# Altium PCB PCI Express_16765X11115_36PIN_Half length.PCBDOC (part 1 of 2)
Units mil, origin at the board's own origin, x right, y up, seen from the top; angles counter-clockwise.
Board outline 6725.36 x 2712.6 mil, 4 copper layers (TopLayer, InternalPlane1, InternalPlane2, BottomLayer); 107 components, 103 nets, 466 pads, 237 vias.
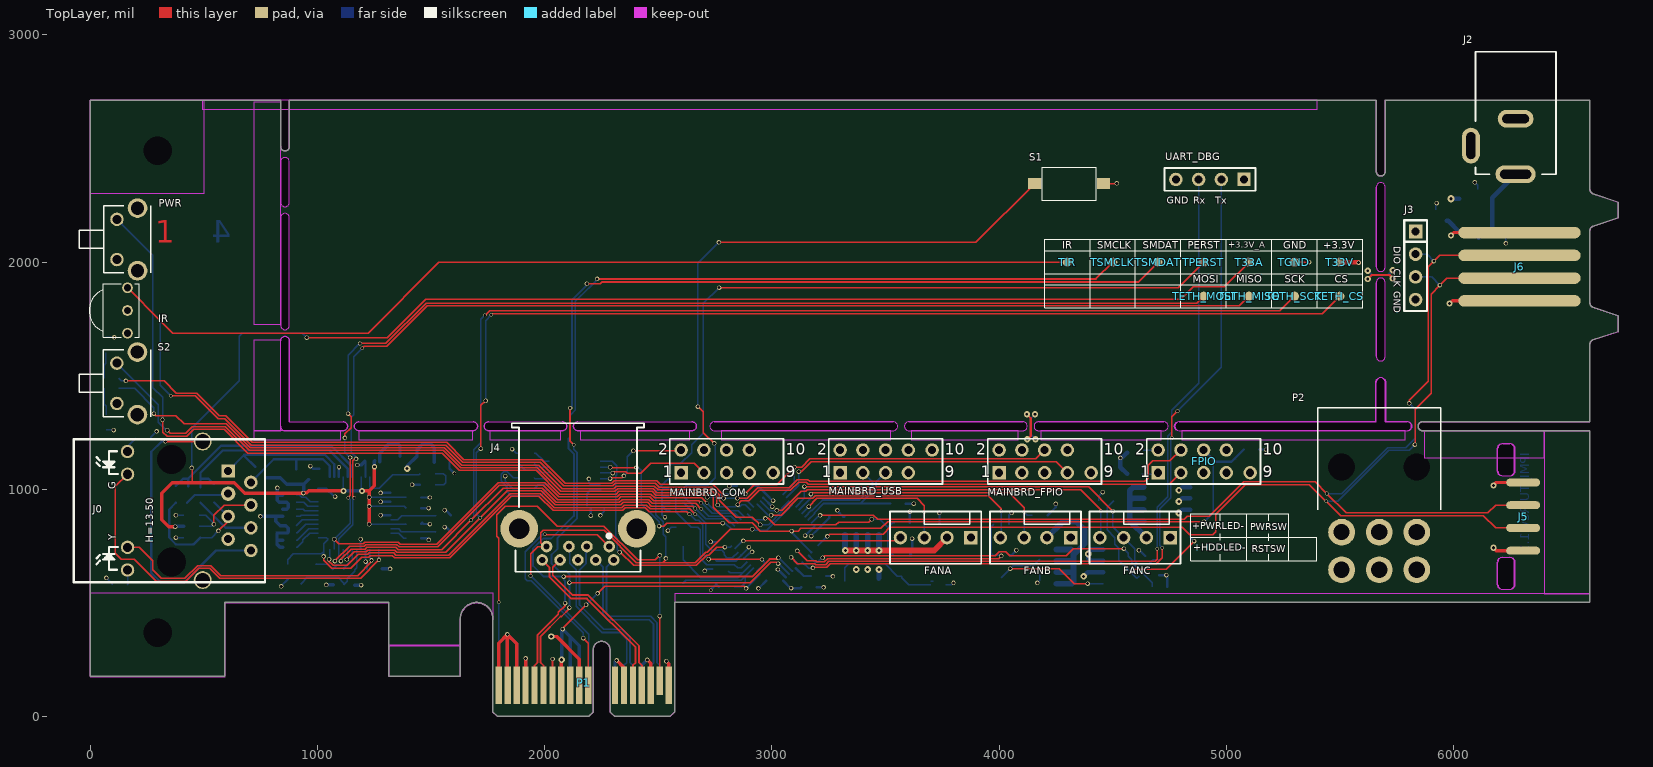
[diagram p0: TopLayer view]
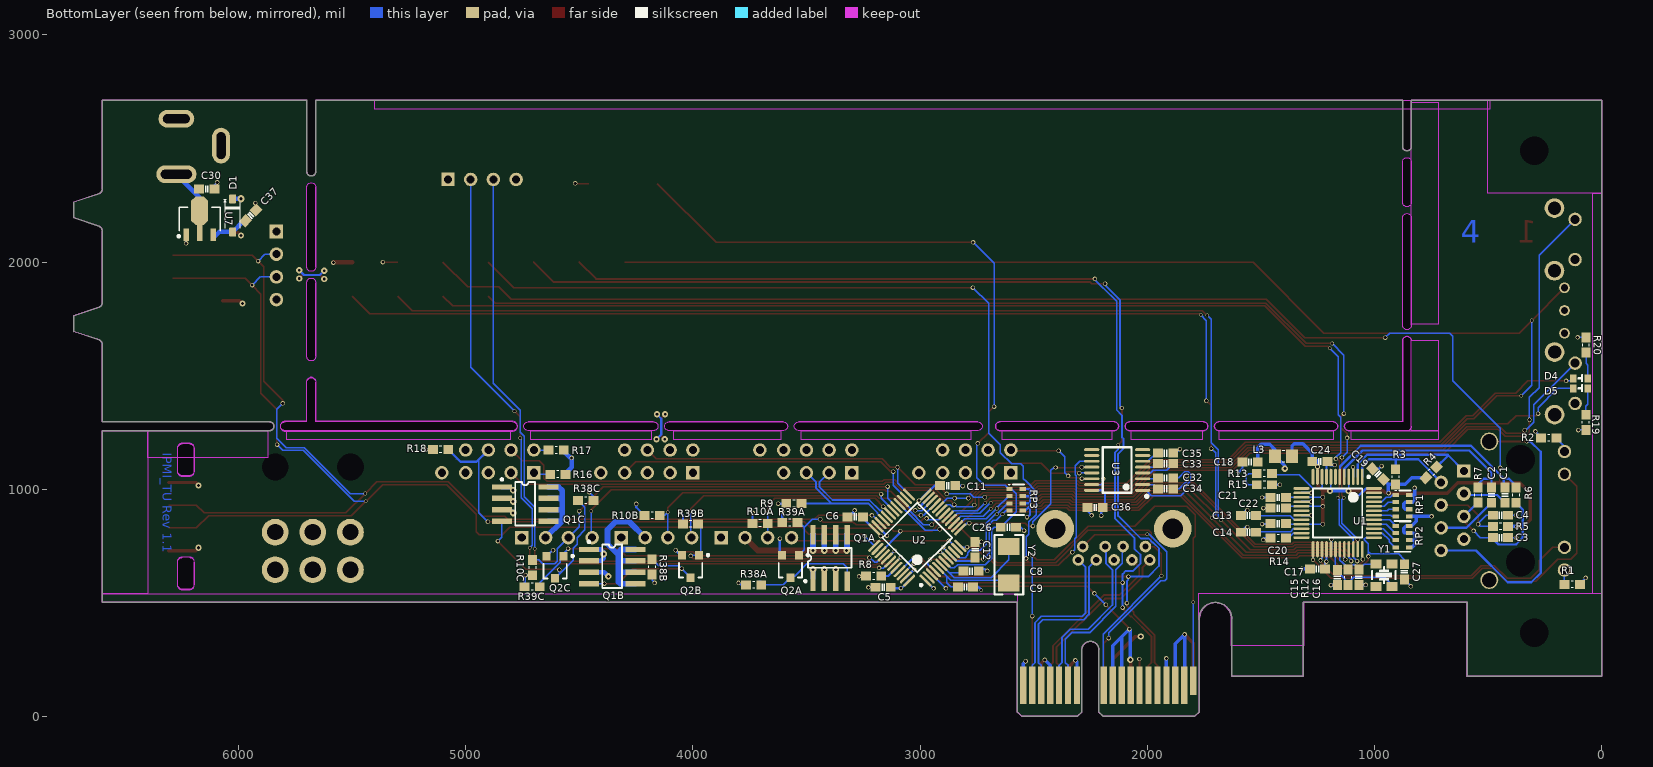
[diagram p1: BottomLayer view, seen from below]
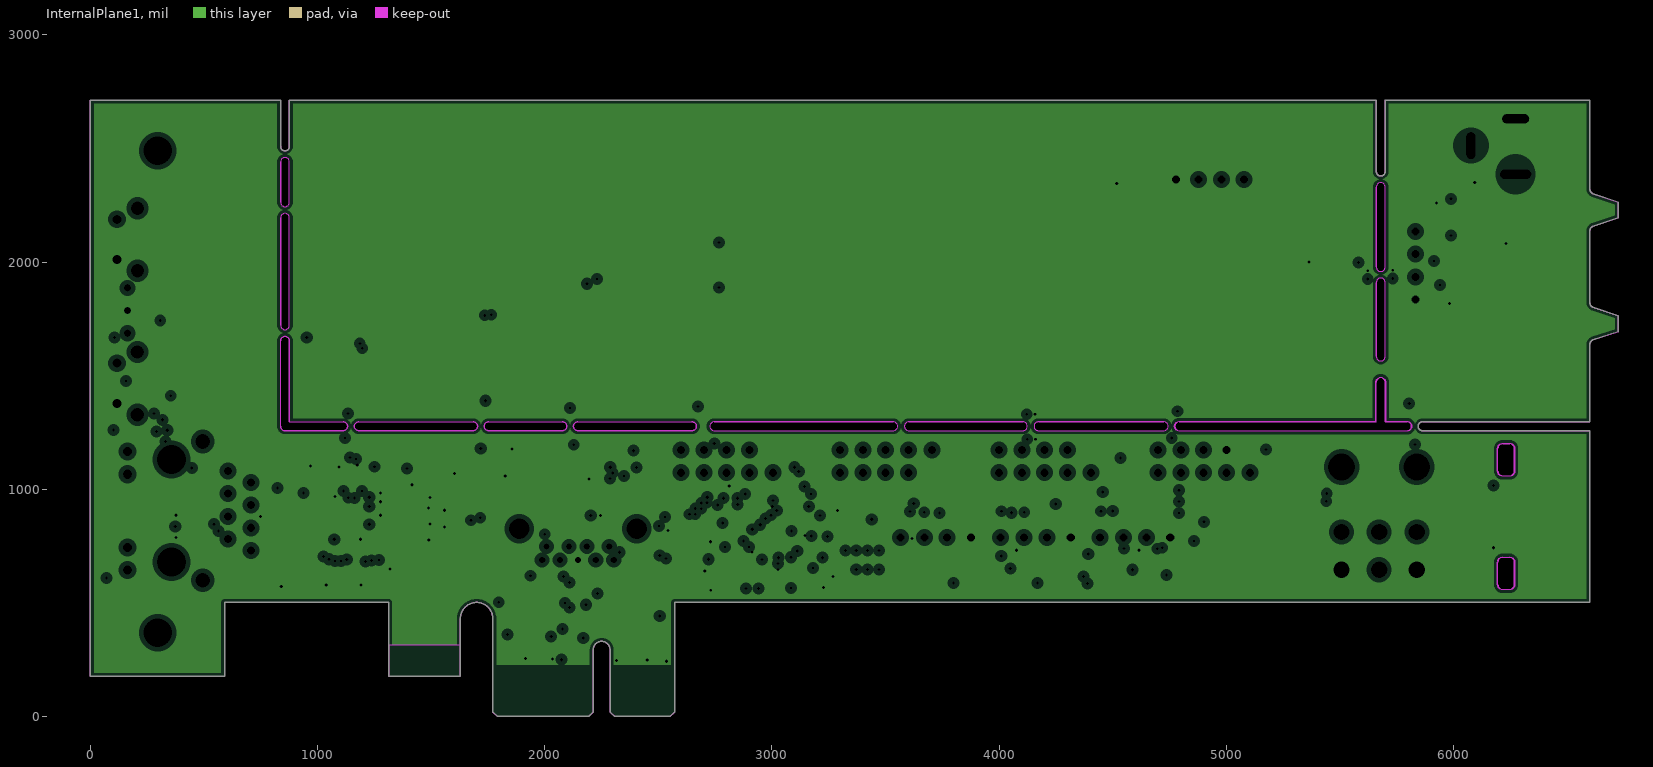
[diagram p2: InternalPlane1, clearances drawn from the general rule]
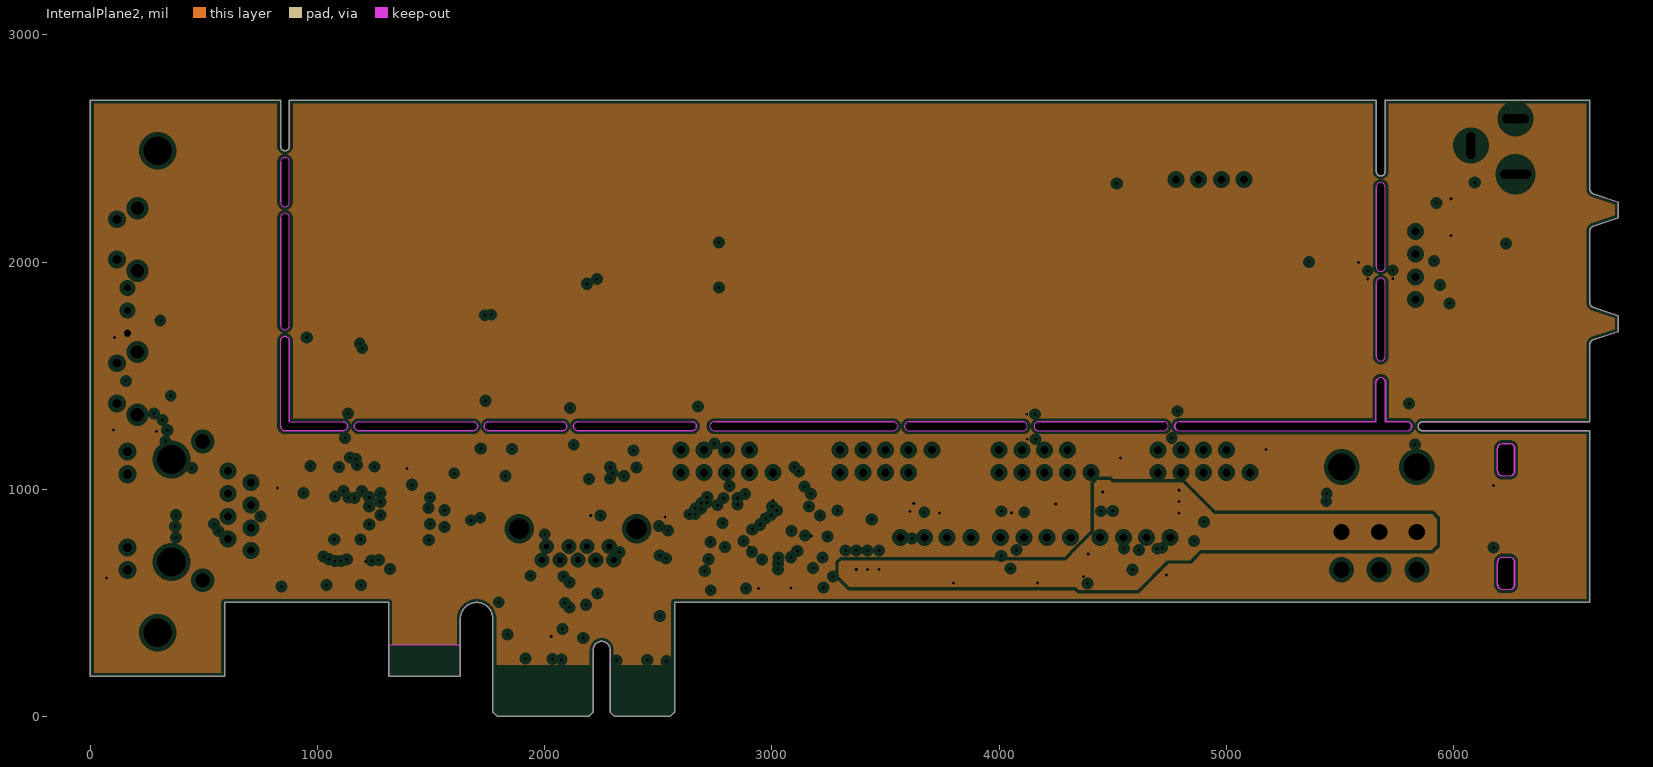
[diagram p3: InternalPlane2, clearances drawn from the general rule]
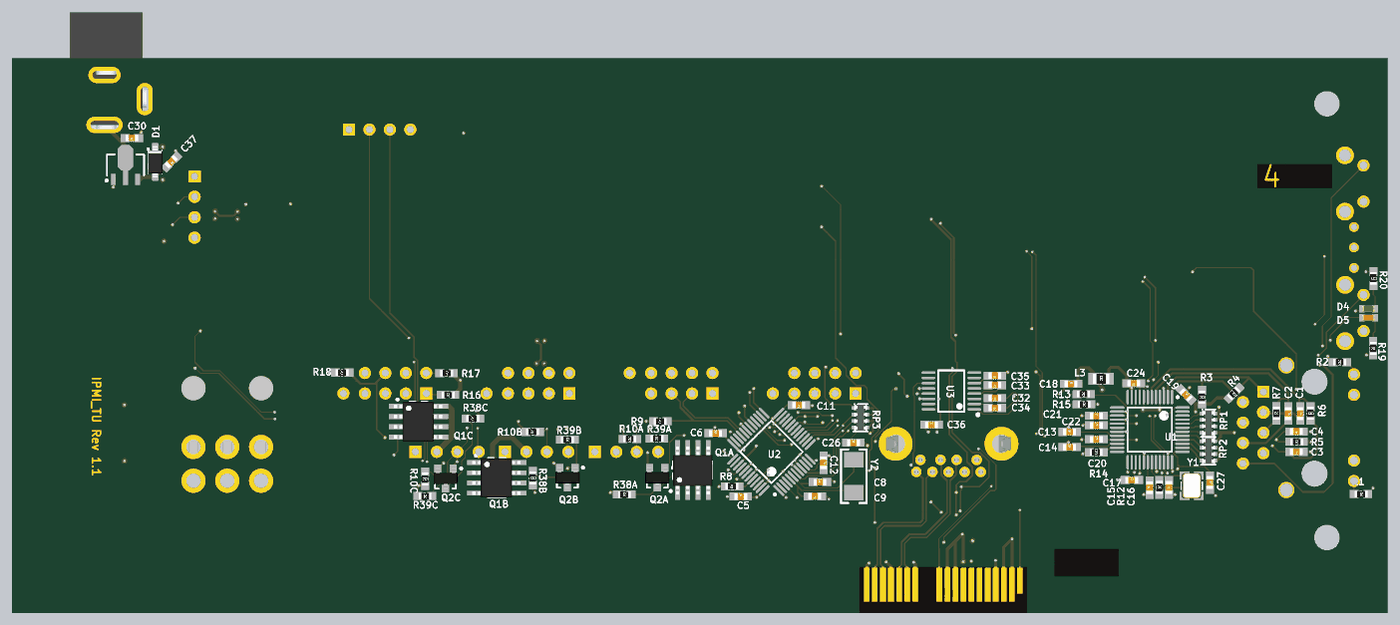
[diagram p5: 3D render of the assembled board from below, using the file's embedded part models]

## Layer stack, top to bottom
TopSolder: solder mask 0.4, Solder Resist, Dk 3.5
TopLayer: signal copper 0.7
Dielectric1: core 12.5984, FR-4, Dk 4.8
InternalPlane1: plane copper 1.4, net GND
Dielectric2: prepreg 12.6, FR-4, Dk 4.8
InternalPlane2: plane copper 1.4, net (Multiple Nets)
Dielectric3: core 12.6, FR-4, Dk 4.8
BottomLayer: signal copper 0.7
BottomSolder: solder mask 0.4, Solder Resist, Dk 3.5

## Board outline
1312.99,177.17 1627.95,177.17 1627.95,430.12 cw(c1699.8,430.12) 1771.65,430.12 1771.65,19.68 1791.34,0 2192.91,0 2212.6,19.68 2212.6,293.31 cw(c2250,293.31) 2287.4,293.31 2287.4,19.68 2307.09,0 2551.18,0 2570.87,19.68 2570.87,501.97 6600.39,501.97 6600.39,1257.87 5864,1257.87 cw(c5864,1277.56) 5864,1297.24 6600.39,1297.24 6600.39,1638.84 cw(c6620.08,1638.84) 6613.85,1657.51 6725.36,1694.68 6725.36,1764.68 6613.85,1801.85 cw(c6620.08,1820.53) 6600.39,1820.53 6600.39,2138.84 cw(c6620.08,2138.84) 6613.85,2157.51 6725.36,2194.68 6725.36,2264.68 6613.85,2301.85 cw(c6620.08,2320.53) 6600.39,2320.53 6600.39,2712.6 5699.37,2712.6 5699.37,2398.9 cw(c5679.68,2398.9) 5660,2398.9 5660,2712.6 875.98,2712.6 875.98,2509.84 cw(c856.3,2509.84) 836.61,2509.84 836.61,2712.6 0,2712.6 0,177.17 590.55,177.17 590.55,501.97 1312.99,501.97
cut-out: 5660,1585 ccw(c5679.68,1585) 5699.37,1585 5699.37,1910 ccw(c5679.68,1910) 5660,1910
cut-out: 5660,1978.9 ccw(c5679.68,1978.9) 5699.37,1978.9 5699.37,2330 ccw(c5679.68,2330) 5660,2330
cut-out: 4793.31,1255.89 cw(c4793.31,1277.56) 4793.31,1299.23 5658.02,1299.23 5658.02,1471 cw(c5679.68,1471) 5701.35,1471.02 cw(c5699.37,1471) 5701.35,1471 5701.35,1299.23 5795.1,1299.23 cw(c5795.1,1277.56) 5816.77,1277.56 cw(c5795.1,1277.56) 5795.1,1255.89
cut-out: 4173.23,1257.87 4724.41,1257.87 ccw(c4724.41,1277.56) 4724.41,1297.24 4173.23,1297.24 ccw(c4173.23,1277.56)
cut-out: 2145.67,1257.87 cw(c2145.67,1277.56) 2145.67,1297.24 2647.64,1297.24 cw(c2647.64,1277.56) 2647.64,1257.87
cut-out: 2746.06,1257.87 3533.46,1257.87 ccw(c3533.46,1277.56) 3533.46,1297.24 2746.06,1297.24 ccw(c2746.06,1277.56)
cut-out: 3602.36,1257.87 4104.33,1257.87 ccw(c4104.33,1277.56) 4104.33,1297.24 3602.36,1297.24 ccw(c3602.36,1277.56)
cut-out: 836.61,2263.78 ccw(c856.3,2263.78) 875.98,2263.78 875.98,2440.94 ccw(c856.3,2440.94) 836.61,2440.94
cut-out: 836.61,1722.44 ccw(c856.3,1722.44) 875.98,1722.44 875.98,2194.88 ccw(c856.3,2194.88) 836.61,2194.88
cut-out: 856.3,1257.87 cw(c856.3,1277.56) 836.61,1277.56 836.61,1653.54 cw(c856.3,1653.54) 875.98,1653.54 875.98,1297.24 1112.2,1297.24 cw(c1112.2,1277.56) 1112.2,1257.87
cut-out: 1181.1,1257.87 cw(c1181.1,1277.56) 1181.1,1297.24 1684.1,1297.24 cw(c1684.1,1277.56) 1684.1,1257.87
cut-out: 1753,1257.87 cw(c1753,1277.56) 1753,1297.24 2076.77,1297.24 cw(c2076.77,1277.56) 2076.77,1257.87

## Design rules (kind name [scope] priority, off if disabled: settings)
Clearance Clearance_1 [OnLayer('KeepOutLayer')] p1: gap=4 ignorepadtopadclearanceinfootprint=FALSE
Clearance [All] p2: gap=6 ignorepadtopadclearanceinfootprint=FALSE except(0: Arc-Hole Track-Hole SMDPad-Hole THPad-Hole Via-Hole Fill-Hole Poly-Hole Region-Hole Text-Hole)
ComponentClearance [All] p1: gap=10 collisioncheckmode=3 verticalgap=6 showdistances=FALSE
DiffPairsRouting [All] p1: maxlimit=10 minlimit=10 mostfreqgap=6.85 toplayer_minwidth=6 toplayer_maxwidth=15 toplayer_prefwidth=9.25 bottomlayer_minwidth=6 bottomlayer_maxwidth=15 bottomlayer_prefwidth=9.25 maxuncoupledlength=500
FabricationTestPointUsage TestPointUsage [All] p1: valid=0 allowmultiple=FALSE
FabricationTestpoint Testpoint [All] p1: side=3 testpointundercomponent=TRUE minsize=40 maxsize=100 preferedsize=60 minholesize=20 maxholesize=40 preferedholesize=32 testpointgrid=1 allowsidetop=TRUE allowsidebottom=TRUE usegrid=TRUE gridtolerance=0.01
Height "PCI Express, Page 84, \"Component Height Constraints\" for solder side" [OnBottomLayer] p1: minheight=0 maxheight=105.12 prefheight=105.12
Height "PCI Express, Page 84, \"Component Height Constraints\" for component side" [OnTopLayer] p2: minheight=0 maxheight=569.68 prefheight=569.68
HoleSize [All] p1: absolutevalues=TRUE maxlimit=354.33 minlimit=0.98 maxpercent=80.000 minpercent=20.000
HoleToHoleClearance [All] p1: gap=6 allowstackedmicrovias=TRUE
MinimumSolderMaskSliver [All] p1: minsoldermaskwidth=6
PlaneClearance [All] p1: clearance=19.68
PlaneConnect [All] p1: pad.planeconnectstyle=Relief pad.reliefexpansion=20 pad.reliefentries=4 pad.reliefconductorwidth=10 pad.reliefairgap=10 via.planeconnectstyle=Direct via.reliefexpansion=20 via.reliefentries=4 via.reliefconductorwidth=10 via.reliefairgap=10
PolygonConnect [All] p1: connectstyle=Relief reliefconductorwidth=10 reliefentries=4 polygonreliefangle="90 Angle" airgapwidth=10
RoomDefinition "Component Free Area" [InAnyComponent] p1: confinementstyle=ConfineOut formatcopy=TRUE lockcomponents=FALSE outline 5592.52,541.34 5592.52,555.12 5913.39,555.12 5913.39,633.86 6120.08,633.86 6120.08,541.34
RoomDefinition Fan3 [InComponentClass('Fan3')] p2: confinementstyle=ConfineIn formatcopy=TRUE lockcomponents=FALSE outline 4382.99,540.99 4893.99,540.99 4893.99,1073.99 4382.99,1073.99
RoomDefinition Fan2 [InComponentClass('Fan2')] p3: confinementstyle=ConfineIn formatcopy=FALSE lockcomponents=FALSE outline 3912.99,520.99 4510.99,520.99 4510.99,916.99 3912.99,916.99
RoomDefinition Fan1 [InComponentClass('Fan1')] p4: confinementstyle=ConfineIn formatcopy=FALSE lockcomponents=FALSE outline 3256.99,541.99 3935.99,541.99 3935.99,916.99 3256.99,916.99
RoutingVias [All] p1: holewidth=13.78 width=19.68 viastyle="Through Hole" minholewidth=13.78 minwidth=19.68 maxholewidth=28 maxwidth=50
SilkToSolderMaskClearance SilkscreenOverComponentPads [IsPad] p1: minsilkscreentomaskgap=10 clearancetoexposedcopper=TRUE
SolderMaskExpansion [All] p1: expansion=0
Width [All] p1: maxlimit=100 minlimit=6 preferedwidth=6
19 further rules are at their usual default settings.

## Classes and differential pairs
channel class FanConn: Fan1 Fan2 Fan3
component class "PCI Express_16765X6890_36PIN_Half length": C18 C26 C27 C30 C32 C33 C34 C35 C36 C37 D1 D4 D5 FPIO IR J2 J4 L3 MAINBRD_COM MAINBRD_FPIO MAINBRD_USB P2 PWR R16 R17 R18 R19 R20 RP3 S1 S2 T33A T33V TETH_CS TETH_MISO TETH_MOSI TETH_SCK TGND TIR TPERST TSMCLK TSMDAT U3 U7 UART_DBG
component class MCU: C5 C6 C8 C9 C11 C12 J3 J5 J6 R8 R9 U2 Y2
component class Fan3: FANC Q1C Q2C R10C R38C R39C
component class Fan2: FANB Q1B Q2B R10B R38B R39B
component class Fan1: FANA Q1A Q2A R10A R38A R39A
component class Ether: C1 C2 C3 C4 C13 C14 C15 C16 C17 C19 C20 C21 C22 C24 J0 R1 R2 R3 R4 R5 R6 R7 R12 R13 R14 R15 RP1 RP2 U1 Y1
component class PCI-E: P1
net class JTAG[1..5]: JTAG1 JTAG2 JTAG3 JTAG4 JTAG5
differential pair RXIN: +RXIN_P -RXIN_N
differential pair REFCLK: +REFCLK_P -REFCLK_N
differential pair USB0: +USB0_P -USB0_N
differential pair TX: +TX_P -TX_N
differential pair RX: +RX_P -RX_N
differential pair PER0: +PER0_P -PER0_N
differential pair PET0: +PET0_P -PET0_N

## Components (designator, comment, footprint, x,y, rotation, side; value= is the part's Value field where it differs from the comment)
C1 "" C-1608[0603] 424.97,974.41 r270 bottom value=6.8nF
C2 "" C-1608[0603] 484.02,974.41 r270 bottom value=6.8nF
C3 "" C-1608[0603] 444.65,787.4 r0 bottom value=10nF
C4 "" C-1608[0603] 444.65,885.83 r0 bottom value=22nF
C5 "" C-1608[0603] 3162,569 r180 bottom value=100nF
C6 "" C-1608[0603] 3285,879 r180 bottom value=100nF
C8 "" C-1608[0603] 2775,640 r180 bottom value=20pF
C9 "" C-1608[0603] 2800,570 r0 bottom value=20pF
C11 "" C-1608[0603] 2878,1016 r0 bottom value=100nF
C12 "" C-1608[0603] 2757,734 r270 bottom value=100nF
C13 "" C-1608[0603] 1554,885 r180 bottom value=100pF
C14 "" C-1608[0603] 1554,811 r180 bottom value=10nF
C15 "" C-1608[0603] 1163,612 r90 bottom value=18pF
C16 "" C-1608[0603] 1068,613 r90 bottom value=18pF
C17 "" C-1608[0603] 1250,649.61 r180 bottom value=100nF
C18 "" C-1608[0603] 1547,1120 r180 bottom value=10uF
C19 "" C-1608[0603] 984,1067 r225 bottom value=100nF
C20 "" C-1608[0603] 1423,849 r180 bottom value=100nF
C21 "" C-1608[0603] 1423,964 r180 bottom value=100nF
C22 "" C-1608[0603] 1423,917 r180 bottom value=100nF
C24 "" C-1608[0603] 1240.16,1122.05 r0 bottom value=10uF
C26 "Cap Semi" C-1608[0603] 2611,833 r180 bottom value=1uF
C27 "Cap Semi" C-1608[0603] 868,637 r270 bottom value=1uF
C30 "" C-1608[0603] 6139.65,2321.79 r0 bottom value=10uF
C32 "" C-1608[0603] 1919,1050 r0 bottom value=0.1uF
C33 "" C-1608[0603] 1919,1113 r0 bottom value=0.1uF
C34 "" C-1608[0603] 1919,1002 r0 bottom value=0.1uF
C35 "" C-1608[0603] 1919,1159 r0 bottom value=0.1uF
C36 "" C-1608[0603] 2229,920 r180 bottom value=0.1uF
C37 "" C-1608[0603] 5946,2206 r315 bottom value=10uF
D1 "1N5819" SOD123 6025.65,2205.79 r270 bottom
D4 "LED_0603, GREEN" LED_0603_GREEN 92,1488 r0 bottom
D5 "LED_0603, RED" LED_0603_RED 92,1444 r0 bottom
FANA "Header 4" FAN_CONN-4P 3870.35,787.36 r0 top (schematic designator FAN)
FANB "Header 4" FAN_CONN-4P 4310.04,787.41 r0 top (schematic designator FAN)
FANC "Header 4" FAN_CONN-4P 4748.03,787.4 r0 top (schematic designator FAN)
FPIO "Header 5X2, Without Pin 10" HDR2X5-10 4700,1073 r0 top
IR "IRM-36xx" IRM-36XX 163,1787 r270 top
J0 "HR911105A" RJ45-8P8C 356.07,905.51 r90 top
J2 "POWER2.5" DC_POWER 6272,2635 r270 top
J3 "SWIM" SIP4 5833,2135 r270 top
J4 "USB1075-XX-X-X_revE" USB1075-XX-X-X_revE 2145.67,826.77 r180 top
J5 "SWIM" SWD_SOCKET 6308,1030 r0 top
J6 "SWIM" SWD_HEADER 6290.36,1929.68 r0 top
L3 "" R-2012[0805] 1400,1145 r180 bottom value="100Ω ±25% 100MHz"
MAINBRD_COM "Header 5X2, Without Pin 10" HDR2X5-10 2600,1073 r0 top
MAINBRD_FPIO "Header 5X2, Without Pin 10" HDR2X5-10 4000,1073 r0 top
MAINBRD_USB "Header 5X2, Without  Pin 9" HDR2X5-9 3300,1073 r0 top
P1 "PCIeX1-GF-2D-1000-1K-O36" PCIeX1-GF-2D-1000-1K-O36 2171.26,137.8 r0 top locked
P2 "PCI-E Aux Power Connector 6Pin" PCIE_AUX_PWR_CONN_6P 5673,811.35 r0 top
PWR "BTN" SW-SIDE 207,2100 r270 top
Q1A "AO4407A" SOP8-MOS 3396,698 r180 bottom (schematic designator Q1)
Q1B "AO4407A" SOP8-MOS 4355,660 r270 bottom (schematic designator Q1)
Q1C "AO4407A" SOP8-MOS 4738,935 r270 bottom (schematic designator Q1)
Q2A "AO3400A" SOT23B 3570.32,660.96 r90 bottom (schematic designator Q2)
Q2B "AO3400A" SOT23B 4010.01,661.01 r90 bottom (schematic designator Q2)
Q2C "AO3400A" SOT23B 4606,657 r90 bottom (schematic designator Q2)
R1 "" R-1608[0603] 128.8,580.76 r180 bottom value=1K
R2 "" R-1608[0603] 232.2,1225.58 r0 bottom value=1K
R3 "" R-1608[0603] 906,1055 r270 bottom value=49.9
R4 "" R-1608[0603] 749.77,1074.41 r315 bottom value=49.9
R5 "" R-1608[0603] 444.65,836.61 r180 bottom value=10
R6 "" R-1608[0603] 375.76,974.41 r90 bottom value=82
R7 "" R-1608[0603] 543.08,975.22 r90 bottom value=82
R8 "" R-1608[0603] 3204,618 r0 bottom value=10K
R9 "" R-1608[0603] 3555,937 r0 bottom value=1.5K
R10A "" R-1608[0603] 3704,850 r0 bottom value=2.2K (schematic designator R10)
R10B "" R-1608[0603] 4179,885 r0 bottom value=2.2K (schematic designator R10)
R10C "" R-1608[0603] 4705.24,655.45 r270 bottom value=2.2K (schematic designator R10)
R12 "" R-1608[0603] 1115,613 r90 bottom value=1M
R13 "" R-1608[0603] 1484.36,1069.46 r0 bottom value=6.2K
R14 "" R-1608[0603] 1423,785 r0 bottom value=10K
R15 "" R-1608[0603] 1484,1020 r180 bottom value=6.2K
R16 "" R-1608[0603] 4594.42,1066.17 r180 bottom value=470
R17 "" R-1608[0603] 4601.42,1172.17 r180 bottom value=470
R18 "" R-1608[0603] 5110.42,1175.17 r0 bottom value=2.2K
R19 "" R-1608[0603] 69,1295 r270 bottom value=470
R20 "" R-1608[0603] 68,1635 r90 bottom value=470
R38A "" R-1608[0603] 3732,579 r180 bottom value=10K (schematic designator R38)
R38B "" R-1608[0603] 4179.01,659.01 r90 bottom value=10K (schematic designator R38)
R38C "" R-1608[0603] 4471.36,950.46 r0 bottom value=10K (schematic designator R38)
R39A "" R-1608[0603] 3573,853 r180 bottom value=10K (schematic designator R39)
R39B "" R-1608[0603] 4010.04,847 r180 bottom value=10K (schematic designator R39)
R39C "" R-1608[0603] 4707,571 r180 bottom value=10K (schematic designator R39)
RP1 "10K" R0603x4 876,928 r270 bottom
RP2 "10K" R0603x4 876,792 r270 bottom
RP3 "10K" R0603x4 2577,954 r270 bottom
S1 "RESET" SW-2pin-SMD 4307.65,2345.94 r0 top
S2 "BTN" SW-SIDE 206.69,1466.54 r270 top
T33A "+3.3V_A" TESTPOINT 5100,2000 r90 top
T33V "+3.3V" TESTPOINT 5500,2000 r90 top
TETH_CS "CS" TESTPOINT 5500,1850 r90 top
TETH_MISO "MISO" TESTPOINT 5100,1850 r90 top
TETH_MOSI "MOSI" TESTPOINT 4900,1850 r90 top
TETH_SCK "SCK" TESTPOINT 5300,1850 r90 top
TGND "GND" TESTPOINT 5300,2000 r90 top
TIR "IR" TESTPOINT 4300,2000 r90 top
TPERST "PERST" TESTPOINT 4900,2000 r90 top
TSMCLK "SMCLK" TESTPOINT 4500,2000 r90 top
TSMDAT "SMDAT" TESTPOINT 4700,2000 r90 top
U1 "DRIVER-W5500" TQFP48_N 1161.42,895.67 r270 bottom
U2 "STM32F103C8T6" TQFP48_N 3011.81,787.4 r45 bottom
U3 "SP3232EEY" LC-TSSOP-16 2132,1085 r90 bottom
U7 "SOT-89 HT7533-1" SOT89 6170.65,2190.79 r270 bottom
UART_DBG "Header 4" HDR1X4 5077.92,2364 r180 top
Y1 "25MHZ 12PF 10PPM" XT_3225_4 957,622 r90 bottom
Y2 "8MHz" LC-SMD-5032_2P 2609,668 r270 bottom

## Footprints (in the part's own frame and the unit in brackets; to place one, negate y for a bottom-side part, rotate by r counter-clockwise, add the part's x,y. Pads: shape width x height; smd on the part's side, far side on the other; paste and mask are expansions set on the pad)
C-1608[0603] [mm] "Chip Capacitor; Body 1.6 x 0.8 mm (LxW typ)"
  rect 1.1x1 smd: 1(-0.85,0) 2(0.85,0)
  silkscreen extent -0.13,-0.38 0.13,0.38, body extent -0.8,-0.42 0.8,0.38, height 0.29
DC_POWER [mm]
  oval 2x4.5 hole 1 slot 3.5 at 90 deg: 1(6.3,0.036)
  oval 2x4 hole 1 slot 3 at 90 deg: 2(0.1,0.036)
  oval 4x2 hole 1 slot 3 at 0 deg: 3(3.1,-4.964)
  silkscreen extent -7.4,-4.46 6.3,4.54, body extent -7.66,-5.17 6.84,4.33, height 11
FAN_CONN-4P [mm] "PWM Fan Connector 4 Pin"
  rect 1.5x1.5 hole 0.9: 1(0.127,0)
  round 1.5 hole 0.9: 2(-2.54,0) 3(-5.08,0) 4(-7.747,0)
  silkscreen extent -8.91,-2.92 1.29,2.92
HDR1X4 [mm] "Connector; Header; 4 Position"
  rect 1.5x1.5 hole 0.9: 1(0,0)
  round 1.5 hole 0.9: 2(2.54,0) 3(5.08,0) 4(7.62,0)
  silkscreen extent -1.27,-1.27 8.89,1.27
HDR2X5-9 [mm] "Connector; Header; 5x2 Position, Without Pin 9"
  rect 1.5x1.5 hole 0.9: 1(0,0)
  round 1.5 hole 0.9: 2(0,2.54) 3(2.54,0) 4(2.54,2.54) 5(5.08,0) 6(5.08,2.54) 7(7.62,0) 8(7.62,2.54) 10(10.287,2.54)
  silkscreen extent -1.27,-1.27 11.43,3.81
HDR2X5-10 [mm] "Connector; Header; 5x2 Position, Without Pin 10"
  rect 1.5x1.5 hole 0.9: 1(0,0)
  round 1.5 hole 0.9: 2(0,2.54) 3(2.54,0) 4(2.54,2.54) 5(5.08,0) 6(5.08,2.54) 7(7.62,0) 8(7.62,2.54) 9(10.287,0)
  silkscreen extent -1.27,-1.27 11.43,3.81
IRM-36XX [mm]
  round 1.2 hole 0.8: 1(-2.54,0) 2(0,0) 3(2.54,0)
  silkscreen extent -3,-4.3 3,1.3, body extent -3,-4.3 3,1.3, height 6.95
LC-SMD-5032_2P [mm]
  rect 1.9x2.4 smd: 1(-2.05,0) 2(2.05,0)
  silkscreen extent -3.32,-1.6 3.32,1.6
LC-TSSOP-16 [mm]
  oval 0.32x1.7 smd: 1(-2.275,-2.85) 2(-1.625,-2.85) 3(-0.975,-2.85) 4(-0.325,-2.85) 5(0.325,-2.85) 6(0.975,-2.85) 7(1.625,-2.85) 8(2.275,-2.85) 9(2.275,2.85) 10(1.625,2.85) 11(0.975,2.85) 12(0.325,2.85) 13(-0.325,2.85) 14(-0.975,2.85) 15(-1.625,2.85) 16(-2.275,2.85)
  silkscreen extent -3.1,-3.45 2.55,1.6
LED_0603_GREEN [mil]
  rect 28x36 smd: 1(-32,0) 2(32,0)
  silkscreen extent -10,-16 10,16, body extent -32,-16 32,16, height 24
LED_0603_RED [mil]
  rect 28x36 smd: 1(-32,0) 2(32,0)
  silkscreen extent -10,-16 10,16, body extent -32,-16 32,16, height 24
PCIE_AUX_PWR_CONN_6P [mm]
  round 0 hole 3: 0(-4.2,7.3) 0(4.2,7.3)
  round 3 hole 1.8: 1(-4.2,0) 2(0,0) 3(4.2,0) 4(-4.2,-4.2) 5(0,-4.2) 6(4.2,-4.2)
  silkscreen extent -6.9,2.5 6.9,13.9, body extent -9.9,-2.1 9.9,13.9, height 11
PCIeX1-GF-2D-1000-1K-O36 [mm] "Golden finger, PCIeX1, Dual, Opposite, Pitch 1mm, 36-Position"
  rect 0.7x3.2 smd far side paste-1: A1(-9.5,0.5)
  rect 0.7x4.2 smd far side paste-1: A2(-8.5,0) A3(-7.5,0) A4(-6.5,0) A5(-5.5,0) A6(-4.5,0) A7(-3.5,0) A8(-2.5,0) A9(-1.5,0) A10(-0.5,0) A11(0.5,0) A12(3.5,0) A13(4.5,0) A14(5.5,0) A15(6.5,0) A16(7.5,0) A17(8.5,0) A18(9.5,0)
  rect 0.7x4.2 smd paste-1: B1(-9.5,0) B2(-8.5,0) B3(-7.5,0) B4(-6.5,0) B5(-5.5,0) B6(-4.5,0) B7(-3.5,0) B8(-2.5,0) B9(-1.5,0) B10(-0.5,0) B11(0.5,0) B12(3.5,0) B13(4.5,0) B14(5.5,0) B15(6.5,0) B16(7.5,0) B18(9.5,0)
  rect 0.7x3.2 smd paste-1: B17(8.5,0.5)
R0603x4 [mm] "Chip Resistor Array, (0603x4); SM; 8 Leads; Body 3.40 x 1.80 mm (LxW max)"
  rect 0.45x0.7 smd: 1(-1.2,-0.75) 2(-0.4,-0.75) 3(0.4,-0.75) 4(1.2,-0.75) 5(1.2,0.75) 6(0.4,0.75) 7(-0.4,0.75) 8(-1.2,0.75)
  silkscreen extent -1.75,-0.9 1.7,0.9, body extent -1.6,-0.76 1.6,0.84, height 0.65
R-1608[0603] [mm] "Chip Resistor; Body 1.6 x 0.8 mm (LxW typ)"
  rect 1.1x1 smd: 1(-0.85,0) 2(0.85,0)
  silkscreen extent -0.13,-0.38 0.13,0.38, body extent -1.27,-0.51 1.33,0.49, height 0.48
R-2012[0805] [mm] "Chip Resistor; Body 2.0 x 1.3 mm (LxW typ)"
  rect 1.3x1.5 smd: 1(-0.95,0) 2(0.95,0)
  silkscreen extent -0.13,-0.64 0.13,0.64, body extent -1.5,-0.69 1.5,0.71, height 0.48
RJ45-8P8C [mm]
  rect 1.5x1.5 hole 0.9: 1(4.45,-6.35)
  round 1.5 hole 0.9: 2(3.18,-8.89) 4(0.64,-8.89) 5(-0.63,-6.35) 6(-1.9,-8.89) 7(-3.17,-6.35) 8(-4.44,-8.89)
  round 1.6 hole 0.9: 3(1.91,-6.35)
  round 1.5 hole 1.02: 9(6.625,4.9) 10(4.085,4.9) 11(-4.085,4.9) 12(-6.625,4.9)
  round 2 hole 1.63: 13(7.745,-3.5) 14(-7.745,-3.5)
  round 2.95 hole 3.25 unplated: MH1(5.715,0) MH2(-5.715,0)
  silkscreen extent -8,-10.48 8,10.92
SIP4 [mil]
  rect 60x60 hole 35: 1(0,0)
  round 60 hole 35: 2(100,0) 3(200,0) 4(300,0)
  silkscreen extent -50,-50 350,51
SOD123 [mm] "SOD-123; 2 Leads; Body 2.7 x 1.6 mm, (LxW)"
  round 0.508 on Mech15: 0(0,0)
  rrect25% 1x0.8 smd: 1(1.85,0) 2(-1.85,0)
  silkscreen extent -1.75,-1 1.45,0.85, body extent -1.95,-0.9 1.95,0.9, height 1.18
SOP8-MOS [mm] "Small Outline; 8 Leads; Body Width 4.3 mm; Pitch 1.27 mm"
  rect 0.6x2.2 smd: D(-1.905,2.6) D(-0.635,2.6) D(0.635,2.6) D(1.905,2.6) G(1.905,-2.6) S(-1.905,-2.6) S(-0.635,-2.6) S(0.635,-2.6)
  silkscreen extent -2.88,-2.72 2.4,1.1, body extent -2.45,-3.05 2.45,2.95, height 1.75
SOT23B [mm] "SOT-23; 3 Leads; Body 3.0 x 2.6 mm, inc. leads (LxW max)"
  rect 0.95x0.9 smd: 1(1.25,-0.95) 2(1.25,0.95) 3(-1.25,0)
  silkscreen extent -1.25,-2.07 1.37,1.3, body extent -1.27,-1.52 1.27,1.48, height 1.1
SOT89 [mm] "SOT89, 3-Leads, Body 4,5x2,4mm (max), Pitch 1,50mm, Lead Span 4,1mm, IPC Medium Density"
  rect 1.4x0.6 smd: 1(1.8,-1.5) 3(1.8,1.5)
  oct 3.2x1.9 smd: 2(-0.9,0)
  rect 1.8x0.6 smd: 2(1.6,0)
  silkscreen extent -1.3,-2.48 2.07,2.3, body extent -1.3,-2.3 1.3,2.3, height 1.6
SW-2pin-SMD [mm] "3*6*2.5mm Button"
  rect 1.5x1.2 smd: 1(-3.85,0) 2(3.85,0)
  silkscreen extent -3.05,-1.85 3.05,1.85, body extent -4.03,-1.8 3.97,1.8, height 2.5
SW-SIDE [mm]
  round 2.2 hole 1.5: 0(-3.5,0) 0(3.5,0)
  round 1.5 hole 1: 1(-2.25,-2.3) 2(2.25,-2.3)
  silkscreen extent -3.75,-6.5 3.75,1.5, body extent -3.75,-12.8 3.75,1.5, height 7.2
SWD_HEADER [mm]
  oval 13.7x1.27 smd paste-1817.05: 1(0,5.08) 2(0,2.54) 3(0,0) 4(0,-2.54)
SWD_SOCKET [mil]
  oval 150x35 smd paste+147714: 1(-1.38,0) 2(-1.38,-100) 3(-1.38,-200) 4(-1.38,-300)
  KeepOutLayer board cut-out: -92.38,-471.98 -92.37,-471.98 -92.36,-471.98 -92.36,-471.98 -92.38,-471.98 -100.79,-470.31 -107.92,-465.54 -112.69,-458.41 -114.36,-450 -114.36,-450 -114.36,-350 -112.69,-341.59 -107.92,-334.46 -100.79,-329.69 -92.38,-328.02 -92.38,-328.02 -92.3,-328.02 -92.22,-328.02 -92.22,-328.02 -92.14,-328.02 -92.06,-328.02 -92.06,-328.02 -60.38,-328.02 -60.38,-328.02 -60.39,-328.02 -60.4,-328.02 -60.4,-328.02 -60.38,-328.02 -51.97,-329.69 -44.83,-334.46 -40.07,-341.59 -38.39,-350 -38.39,-350 -38.39,-350 -38.39,-350 -38.39,-350 -38.39,-350 -38.39,-350 -38.39,-350 -38.39,-449 -38.41,-449.25 -38.46,-449.5 -38.46,-449.5 -38.41,-449.75 -38.39,-450 -38.39,-450 -40.07,-458.41 -44.83,-465.54 -51.97,-470.31 -60.38,-471.98 -60.38,-471.98 -60.63,-471.97 -60.88,-471.92 -60.88,-471.92 -60.88,-471.92 -61.13,-471.97 -61.38,-471.98 -61.38,-471.98
  KeepOutLayer board cut-out: -92.38,28.02 -92.37,28.02 -92.36,28.02 -92.36,28.02 -92.38,28.02 -100.79,29.69 -107.92,34.46 -112.69,41.59 -114.36,50 -114.36,50 -114.36,150 -112.69,158.41 -107.92,165.54 -100.79,170.31 -92.38,171.98 -92.38,171.98 -92.3,171.98 -92.22,171.98 -92.22,171.98 -92.14,171.98 -92.06,171.98 -92.06,171.98 -60.38,171.98 -60.38,171.98 -60.39,171.98 -60.4,171.98 -60.4,171.98 -60.38,171.98 -51.97,170.31 -44.83,165.54 -40.07,158.41 -38.39,150 -38.39,150 -38.39,150 -38.39,150 -38.39,150 -38.39,150 -38.39,150 -38.39,150 -38.39,51 -38.41,50.75 -38.46,50.5 -38.46,50.5 -38.41,50.25 -38.39,50 -38.39,50 -40.07,41.59 -44.83,34.46 -51.97,29.69 -60.38,28.02 -60.38,28.02 -60.63,28.03 -60.88,28.08 -60.88,28.08 -60.88,28.08 -61.13,28.03 -61.38,28.02 -61.38,28.02
  KeepOutLayer lines w3.94: -92.38,-330 ccw(c-92.38,-350) -112.38,-350 -112.38,-450 ccw(c-92.38,-450) -92.38,-470 -61.38,-470 ; -92.38,170 ccw(c-92.38,150) -112.38,150 -112.38,50 ccw(c-92.38,50) -92.38,30 -61.38,30 ; -92.06,-330 -60.38,-330 cw(c-60.38,-350) -40.38,-350 -40.38,-449 ; -92.06,170 -60.38,170 cw(c-60.38,150) -40.38,150 -40.38,51 ; -60.38,-470 ccw(c-60.38,-450) -40.38,-450 ; -60.38,30 ccw(c-60.38,50) -40.38,50
TESTPOINT [mil]
  round 40 smd paste-100: 1(0,0)
TQFP48_N [mm] "48-Pin Thin Quad Flat Pack 0.5 mm Pitch, IPC Medium Density"
  oval 1.8x0.3 smd: 1(-4.05,2.75) 2(-4.05,2.25) 3(-4.05,1.75) 4(-4.05,1.25) 5(-4.05,0.75) 6(-4.05,0.25) 7(-4.05,-0.25) 8(-4.05,-0.75) 9(-4.05,-1.25) 10(-4.05,-1.75) 11(-4.05,-2.25) 12(-4.05,-2.75) 25(4.05,-2.75) 26(4.05,-2.25) 27(4.05,-1.75) 28(4.05,-1.25) 29(4.05,-0.75) 30(4.05,-0.25) 31(4.05,0.25) 32(4.05,0.75) 33(4.05,1.25) 34(4.05,1.75) 35(4.05,2.25) 36(4.05,2.75)
  oval 0.3x1.8 smd: 13(-2.75,-4.05) 14(-2.25,-4.05) 15(-1.75,-4.05) 16(-1.25,-4.05) 17(-0.75,-4.05) 18(-0.25,-4.05) 19(0.25,-4.05) 20(0.75,-4.05) 21(1.25,-4.05) 22(1.75,-4.05) 23(2.25,-4.05) 24(2.75,-4.05) 37(2.75,4.05) 38(2.25,4.05) 39(1.75,4.05) 40(1.25,4.05) 41(0.75,4.05) 42(0.25,4.05) 43(-0.25,4.05) 44(-0.75,4.05) 45(-1.25,4.05) 46(-1.75,4.05) 47(-2.25,4.05) 48(-2.75,4.05)
  silkscreen extent -4.17,-2.75 2.75,3.57, body extent -3.5,-3.5 3.5,3.5, height 1.6
USB1075-XX-X-X_revE [mm] "USB 3.0 Receptecal, Type A, 9 Pin, Through Hole, Horizontal, Top Mount, with Kinked Shell Stakes"
  round 1.3 hole 0.7: 1(-3.5,2) 2(-1,2) 3(1,2) 4(3.5,2) 5(4,3.5) 6(2,3.5) 7(0,3.5) 8(-2,3.5) 9(-4,3.5)
  round 4.2 hole 2.3: 10(-6.57,0) 10(6.57,0)
  silkscreen extent -7.39,-11.79 7.39,4.83, body extent -7.8,-11.77 7.8,4.83, height 7.71
XT_3225_4 [mil]
  rect 40x48 smd: 1(-50,-35) 2(50,-35) 3(50,35) 4(-50,35)
  silkscreen extent -38,-54 38,54, body extent -63,-49 63,49, height 41

## Part data
C1 C2 C3 C4 C5 C6 C8 C9 C11 C12 C13 C14 C15 C16 C17 C18 C19 C20 C21 C22 C24 C30 C32 C33 C34 C35 C36 C37: library part "Cap Semi", "Capacitor (Semiconductor SIM Model)", LatestRevisionDate=29-May-2009, LatestRevisionNote="IPC-7351 Footprint Added.", PackageDescription="Chip Capacitor", Published=8-Jun-2000, Publisher="Altium Limited"
  C1 C2 C3 C4 C5 C6 C8 C9 C11 C12 C14 C15 C16 C17 C18 C19 C20 C21 C22 C24 C30 C32 C33 C34 C35 C36 C37: PackageReference=C1206
  C13: PackageReference=4.7uF
C26 C27: "Capacitor (Semiconductor SIM Model)", LatestRevisionDate=29-May-2009, LatestRevisionNote="IPC-7351 Footprint Added.", PackageDescription="Chip Capacitor", PackageReference=C1206, Published=8-Jun-2000, Publisher="Altium Limited"
D1: library part "D Schottky", "Schottky Diode", Code_JEDEC=DO-214-AA, LatestRevisionDate=17-Jul-2002, LatestRevisionNote="Re-released for DXP Platform.", PackageDescription="DO-214-AA/SMB; 2 C-Bend Leads; Body 5.3 x 3.6 mm, inc. leads (LxW)", PackageReference=SMB, Published=8-Jun-2000, Publisher="Altium Limited"
D4 D5: library part LED_0603, "LED"
FANA FANB FANC UART_DBG: "Header, 4-Pin", LatestRevisionDate=17-Jul-2002, LatestRevisionNote="Re-released for DXP Platform.", Publisher="Altium Limited"
FPIO MAINBRD_COM MAINBRD_FPIO MAINBRD_USB: library part "Header 5X2", "Header, 5-Pin, Dual row", LatestRevisionDate=17-Jul-2002, LatestRevisionNote="Re-released for DXP Platform.", Publisher="Altium Limited"
J0: library part RJ45INTLED
J3 J5 J6: library part SWD
J4: "USB 3.0 Receptecal, Type A, 9 Pin, Through Hole, Horizontal, Top Mount, with Kinked Shell Stakes"
L3: library part Inductor, "Inductor", Code_IEC=1005, Code_JEITA=0402, LatestRevisionDate=29-May-2009, LatestRevisionNote="IPC-7351 Footprint Added.", PackageDescription="Chip Inductor", PackageReference=0402-A, Published=8-Jun-2000, Publisher="Altium Limited"
P1: library part CMP-0001-00030-2, "Golden finger, PCIeX1, Dual, Opposite, Pitch 1mm, 36-Position", ClassName="Edge Connector", Datasheet Version="rev2.0, Apr-2007", Mating Connector=Molex-87715-9006, Package Reference=PCIeX1-GF-2D-1000-1K-O36, Publisher=Altium
PWR S1 S2: library part SW-PB, "Switch", LatestRevisionDate=17-Jul-2002, LatestRevisionNote="Re-released for DXP Platform.", PackageReference=SPST-2, Published=24-Mar-1999, Publisher="Altium Limited"
Q1A Q1B Q1C: library part SI2301, "P-Channel MOSFET", LatestRevisionDate=17-Jul-2002, LatestRevisionNote="Re-released for DXP Platform.", PackageReference=E3, PackageVersion=1995/1996, Published=8-Jun-2000, Publisher="Altium Limited"
Q2A Q2B Q2C: library part SI2302, "N-Channel MOSFET", LatestRevisionDate=17-Jul-2002, LatestRevisionNote="Re-released for DXP Platform.", PackageReference=E3, PackageVersion=1995/1996, Published=8-Jun-2000, Publisher="Altium Limited"
R1 R2 R3 R4 R5 R6 R7 R8 R9 R10A R10B R10C R12 R13 R14 R15 R16 R17 R18 R19 R20 R38A R38B R38C R39A R39B R39C: library part "Res Semi", "Semiconductor Resistor", LatestRevisionDate=17-Jul-2002, LatestRevisionNote="Re-released for DXP Platform.", PackageReference=AXIAL-0.5, Published=8-Jun-2000, Publisher="Altium Limited"
  R1 R2 R3 R4 R5 R6 R7 R8 R9 R10A R10B R10C R12 R14 R16 R17 R18 R19 R20 R38A R38B R38C R39A R39B R39C: PackageDescription="Axial Device, Thru-Hole; 2 Leads; 0.5 in Pin Spacing"
RP1 RP2 RP3: library part RPACK4
T33A T33V TETH_CS TETH_MISO TETH_MOSI TETH_SCK TGND TIR TPERST TSMCLK TSMDAT: library part Plug, "Plug", LatestRevisionDate=17-Jul-2002, LatestRevisionNote="Re-released for DXP Platform.", Publisher="Altium Limited"
U2: "ARM", Package=LQFP-48_7x7x05P, SuppliersPartNumber=C8734, ComponentLink1Description=供应商链接, ComponentLink1URL=http://www.szlcsc.com/product/details_9243.html, Supplier=LC
U7: library part HT73XX, "Low Power Consumption LDO"
Y1 Y2: library part XTAL, "Crystal Oscillator", LatestRevisionDate=17-Jul-2002, LatestRevisionNote="Re-released for DXP Platform.", PackageDescription="Crystal, Thru-Hole; 2 Leads; Body 3.1 x 8.2 mm (Dia.xH)", PackageReference=R38, Published=8-Jun-2000, Publisher="Altium Limited"

## Free pads (board coordinates)
  round 113.39 hole 125.2 unplated: MH1(295.28,368.11) MH2(295.28,2490.16)

## Via types
v1: diameter 19.68, hole 13.78, TopLayer to BottomLayer, tented both sides, 173 vias
v2: diameter 15.75, hole 11.81, TopLayer to BottomLayer, tented both sides, 33 vias
v3: diameter 29.53, hole 13.78, TopLayer to BottomLayer, tented both sides, 14 vias
v4: diameter 27.56, hole 11.81, TopLayer to BottomLayer, tented both sides, 8 vias
v5: diameter 27.56, hole 13.78, TopLayer to BottomLayer, tented both sides, 7 vias
v6: diameter 31.5, hole 13.78, TopLayer to BottomLayer, tented both sides, 1 vias
v7: diameter 23.62, hole 11.81, TopLayer to BottomLayer, tented both sides, 1 vias

## Nets (pads, with @x,y where several pads share a name; then routed paths per layer and width w, separated by ;. In a path a pad name is that pad's centre, name@x,y a point inside that pad or via, vN(x,y) a via of type N, cw(c..) or ccw(c..) an arc to the next point about the centre after c; other vN are vias at no path point)
+3.3V: C5.2 C6.2 C11.2 C12.2 C17.2 C18.2 C36.2 D1.2 IR.3 J5.1 J6.1 L3.1 P1.B10 R1.2 R2.2 R9.2 R10A.2 R10B.2 R10C.2 R16.2 R17.2 R18.2 R19.2 R20.2 R39A.1 R39B.1 R39C.1 RP1.6 RP1.7 RP1.8 RP3.5 RP3.6 RP3.7 RP3.8 T33V.1 U1.28 U2.1 U2.9 U2.24 U2.36 U2.48 U3.16 | length 3000
  TopLayer w10: v4(4122,1330) 4139,1313 4139,1235 v4(4124,1220) ; v4(5623,1926) 5640,1943 5718,1943 v4(5733,1928)
  TopLayer w15: v5(2028,352) 2052,352 2152,252 2151.57,251.57 P1.B10@2151.57,137.8 ; v5(5989.38,2117.68) 6002.38,2130.68 J6.1@6077,2130.68 ; v5(6176,1017) 6189,1030 J5.1@6306.62,1030
  TopLayer w20: T33V.1@5500,2000 5580,2000 v1(5582,1998)
  BottomLayer w6: R20.2@68,1668.46 v1@104.46,1668.46 ; R19.2@69,1261.54 101.46,1261.54 v1(102,1261) ; v1(69.74,610.29) 95.33,584.7 R1.2@95.33,580.76 ; R2.2@265.67,1225.58 265.67,1229.52 v1(291.26,1255.11)
  BottomLayer w8: U1.28@1210.63,736.22 1211,735.85 v1(1211,682) 1215.46,682 1216.54,683.07 C17.2@1216.54,649.61
  BottomLayer w10: C36.2@2186,929.54 2186,981 2200.43,995.43 U3.16@2244.2,995.43 ; v1(2202,884) C36.2@2202,913.54 ; v1(2529,878) 2526,878 2516,888 2516,927 ; RP3.5@2547.47,906.76 2536.24,906.76 2516,927 ; RP3.6@2547.47,938.25 2517.25,938.25 2516,937 ; RP3.7@2547.47,969.75 2516.75,969.75 2516,969 ; RP3.8@2547.47,1001.24 2519.83,1001.24 2516,997.42 2516,969 ; C12.2@2755,687 2758,684 2838.81,684 U2.9@2864.27,709.45 2864.27,709.27 2898,743 v1(2898,746) ; C11.2@2911.46,1016 2936.33,1016 U2.24@2975.62,976.71 3002.33,950 v1(3005,950) ; v1(2940,564) 2941.52,564 U2.1@2975.62,598.1 ; U2.48@3048,598.1 3081.1,565 v1(3084,565) 3124.54,565 C5.2@3128.54,569 ; v1(3173,793.84) 3173,795.47 U2.36@3201.12,823.59 3251.54,874.01 C6.2@3251.54,879 ; R9.2@3588.46,937 v1(3624,937) ; R39A.1@3606.46,853 3606.46,901.46 v1(3607,902) ; v1(3737,896) 3737,850.46 R10A.2@3737.46,850 ; R39B.1@4043.5,847 4043.5,885.5 v1(4055,897) ; R10B.2@4212.46,885 4249,921.54 v1(4249,936) v1@4248,937 ; R10C.2@4705.24,621.98 v1(4735.83,622) ; v1(4735.83,622) 4740.46,617.36 R39C.1@4740.46,571 ; R18.2@5143.88,1175.17 5174.83,1175.17 v1(5175,1175) ; 2516,927 2516,937 ; 2516,937 2516,969
  BottomLayer w15: v1(823,1006) 823,974 ; RP1.6@846.47,912.25 863.25,912.25 871,920 871,936 863.25,943.75 RP1.7@846.47,943.75 830.88,943.75 823,951.63 823,974 ; RP1.8@846.47,975.24 845.23,974 823,974 ; v3(1394,1091) 1394,1099.6 1393,1100.6 L3.1@1437.4,1145 1437.4,1174.4 1461,1198 1499,1198 1513.54,1183.46 C18.2@1513.54,1120
  BottomLayer w20: v1(4533.42,1138.17) 4533.42,1097.7 R16.2@4562.95,1068.17 ; v1@4539.42,1138.17 R17.2@4562.95,1161.7 ; v6@5989.81,2278.62 D1.2@6025.65,2278.62
  other v1: 105,1669
  other v6: 5989.65,2278.79
+3.3V_A: C19.2 C20.2 C21.2 C22.2 C24.2 L3.2 R3.2 R4.2 R5.2 T33A.1 U1.4 U1.8 U1.11 U1.15 U1.17 U1.21 | length 7856
  TopLayer w6: 447,1029 v1@447,1093 ; v1(952,1668) 1307,1668 1476,1837 4800,1837 4854,1891 4991,1891 T33A.1@5100,2000
  TopLayer w15: v1(373,836) 344,836 314,866 314,983 360,1029 447,1029 632,1029 678.34,982.66 v1@935.66,982.66 ; v1@937,984 952,984 961,993 v5(1114,993) ; v5(1195,993) 1227,993 ; v1(1227,846) v1(1227,925) v1(1227,965) 1227,993 ; v7(1250,1099) 1250,1016 1227,993
  BottomLayer w6: v1(446,1094) 445.5,1094.5 445.5,1268.5 654,1477 654,1674 668,1688 933,1688 952,1669 v1(952,1668) ; U1.4@1112.2,1055.12 1112.2,994.8 v5(1114,993) ; U1.8@1190.94,1055.12 1190.94,997.06 v5(1195,993) ; v1(1227,846) 1227.46,846.46 U1.21@1320.87,846.46 1386.99,846.46 C20.2@1389.54,849 ; v1(1227,925) 1227.2,925.2 U1.17@1320.87,925.2 1381.34,925.2 C22.2@1389.54,917 ; v1(1227,965) 1227.43,964.57 U1.15@1320.87,964.57 1388.97,964.57 C21.2@1389.54,964
  BottomLayer w15: v1@373.61,836.61 R5.2@411.19,836.61 ; R4.2@773.43,1050.75 835.25,1050.75 864.46,1021.54 R3.2@906,1021.54 938.54,1021.54 ; v1(937,983) 938.54,984.54 938.54,1021.54 ; C19.2@960.34,1043.34 938.54,1021.54 ; v5(1114,993) v5(1195,993) ; v7(1250,1099) 1250,1124 1251,1125 ; C24.2@1273.62,1122.05 1273.62,1159.62 1314,1200 1352,1200 1362.6,1189.4 L3.2@1362.6,1145
+3.3V_ON: P1.A9 P1.A10 P1.B8 U2.3 | length 1718.1
  TopLayer w6: v1(2078.5,384.5) 2078.5,388.5 v1(2182,492) ; v1(2232,542) 2262.87,572.87 2877.13,572.87 v1(2886,564)
  TopLayer w15: P1.B8@2072.83,137.8 2072.83,248.83 v3(2074,250)
  BottomLayer w6: v1(2182,492) v1(2232,542) ; v1(2886,564) 2886,564.15 U2.3@2947.78,625.94
  BottomLayer w15: v3(2074,250) 2074,380 v1(2078.5,384.5) 2112.2,350.8 ; P1.A9@2112.2,137.8 2112.2,350.8 ; P1.A10@2151.57,137.8 2151.57,311.43 2112.2,350.8
+12V: P1.A2 P1.A3 P1.B1 P1.B2 P1.B3 | length 1167
  TopLayer w15: P1.B1@1797.24,137.8 1797.24,323.24 v1(1835,361) ; P1.B2@1836.61,137.8 1835,139.41 v1(1835,361) ; P1.B3@1875.98,137.8 1875.98,320.02 v1(1835,361)
  BottomLayer w15: P1.A2@1836.61,137.8 1835,139.41 v1(1835,361) 1875.98,320.02 P1.A3@1875.98,137.8
+12V_ADD: P2.1 P2.2 P2.3 Q1A.S Q1B.S Q1C.S R38A.1 R38B.1 R38C.1 | length 590.6
  BottomLayer w6: R38A.1@3765.46,579 3790,579 v1(3799,588) ; v1(4168,588) 4179.01,599.01 R38B.1@4179.01,625.54 ; R38C.1@4437.9,950.46 4437.9,969.9 v1(4456,988)
  BottomLayer w20: Q1A.S@3469,606 3471,608 v3(3471,647) ; v3(4372,617) 4390,635 Q1B.S@4457.36,635 ; Q1B.S@4457.36,685 4404,685 4392,697 v3(4392,715) 4392,722 4405,735 Q1B.S@4457.36,735 ; v3(4791,896) 4805,910 Q1C.S@4840.36,910 ; v3(4791,946) 4805,960 Q1C.S@4840.36,960 ; v3(4791,996) 4805,1010 Q1C.S@4840.36,1010
  other v3: 3371,647 3421,647
ACT: J0.11 U1.27 | length 1278.2
  TopLayer w6: J0.11@163.16,744.68 214.32,744.68 273,686 273,647 312.46,607.54 415.43,607.54 471.9,664 530,664 574,620 1175.65,620 1237,681.35 v1(1237,687)
  BottomLayer w6: U1.27@1230.32,736.22 1230.32,699.68 1237,693 v1(1237,687)
BTN: FPIO.6 R18.1 S2.1 U2.39 | length 5858.8
  TopLayer w6: v1(338,1260) 352,1246 419.03,1246 449.03,1276 593.06,1276 698.06,1171 1552.97,1171 1628.97,1095 1967,1095 2070.84,991.16 2308.72,991.16 2320.01,1002.45 2477.1,1002.45 2493.59,985.96 2724.69,985.96 2742.16,968.49 2742.16,921.84 2811,853 2912.35,853 2949.35,816 v1(3086,816) 3116,816 3127.51,827.51 3479.54,827.51 3509.03,857 v1(4902,857)
  BottomLayer w6: S2.1@116.14,1555.12 298,1373.26 298,1295.35 333.35,1260 v1(338,1260) ; v1(4902,857) 4942,897 4942,1133 ; 5038.39,1136.61 5042,1133
  BottomLayer w10: v1(3086,816) 3086,810.65 U2.39@3173.28,723.37 ; FPIO.6@4900,1173 4951.83,1121.17 ; 4956.42,1121.17 5022.95,1121.17 5038.39,1136.61 R18.1@5076.95,1175.17
ETH_INT: RP3.3 U1.36 U2.10 | length 2275.7
  TopLayer w6: v1(1050,692) 1050,689.35 1047,686.35 1068.2,665.16 1130.16,665.16 1178.16,713.16 1219.54,713.16 1226.38,720 1334.12,720 1343.96,710.16 1577.16,710.16 1848,981 1979.18,981 2041.02,919.16 2338.54,919.16 2349.83,930.45 2447.28,930.45 2463.76,913.96 2638.28,913.96 v2(2662.62,889.62)
  BottomLayer w6: v1(1050,692) 1053.15,695.15 U1.36@1053.15,736.22 ; RP3.3@2606.53,938.25 2613.99,938.25 v2(2662.62,889.62) 2668.35,889.62 2708,849.97 2708,759 2735.81,731.19 2780.41,731.19 2785.69,725.92 2785.69,725.2 2789.6,721.28 2789.6,711 2801.6,699 2825.97,699 U2.10@2850.35,723.37
ETH_MISO: TETH_MISO.1 U1.34 U2.16 | length 7019.2
  TopLayer w6: v1(1076,684) 1076,684.65 1140.51,749.16 1204.63,749.16 1211.47,756 1349.03,756 1358.87,746.16 1529.28,746.16 1800.12,1017 1994.09,1017 2055.93,955.16 2323.63,955.16 2334.92,966.45 2462.19,966.45 2478.68,949.96 2678.65,949.96 v2(2688.61,940) ; v2(1162,962) 1155,969 1155,1125.35 1161.84,1132.2 1161.84,1132.84 1163,1134 v1(1169,1134) ; v2(1196,1621) 1205,1630 1304.97,1630 1481.97,1807 5057,1807 TETH_MISO.1@5100,1850
  BottomLayer w6: v1(1076,684) 1076,684.65 1092.52,701.17 U1.34@1092.52,736.22 1092.52,782.52 1155,845 1155,955 v2(1162,962) ; v1(1169,1134) 1169,1140.65 1148,1161.65 1148,1318 1159,1329 1159,1584 v2(1196,1621) ; v2(2688.61,940) 2690.2,940 2736.2,894 2835.62,894 U2.16@2864.27,865.35
ETH_MOSI: TETH_MOSI.1 U1.35 U2.17 | length 6793.6
  TopLayer w6: v1(1073,780) 1091.84,761.16 1199.66,761.16 1206.5,768 1354,768 1363.84,758.16 1524.3,758.16 1795.15,1029 1999.06,1029 2060.9,967.16 2318.66,967.16 2329.95,978.45 2467.16,978.45 2483.65,961.96 2690.51,961.96 2711.94,940.53 v2(2713.53,940.53) ; v1(1120,1226) 1120,1243.83 1148,1271.83 1148,1319 v1(1134,1333) ; v2(1135,963) 1135,965 1143,973 v1(1143,1140) ; v2(1186,1642) 1300,1642 1477,1819 4869,1819 TETH_MOSI.1@4900,1850
  BottomLayer w6: U1.35@1072.83,736.22 1072.83,779.83 v1(1073,780) 1143,850 1143,955 v2(1135,963) ; v1(1120,1226) 1120,1163 v1(1143,1140) ; v1(1134,1333) 1134,1590 v2(1186,1642) ; v2(2713.53,940.53) 2748.07,906 2851.45,906 U2.17@2878.18,879.27
ETH_RST: C27.1 RP3.4 U1.37 U2.4 | length 2739
  TopLayer w6: v1(1026.04,704.36) 1026.04,688.42 1061.46,653 1146,653 1194.16,701.16 1224.51,701.16 1231.35,708 1329.15,708 1338.99,698.16 1539.84,698.16 1540,698 1581.97,698 1852.97,969 1974.21,969 2036.05,907.16 2343.51,907.16 2354.8,918.45 2442.3,918.45 2458.79,901.96 2624.83,901.96 v2(2637,889.79) ; v1(2721,692) 2955,692 v1(2956,691)
  BottomLayer w6: C27.1@868,670.46 868,691 893,716 1016.04,716 1026.04,726 ; U1.37@1001.97,787.4 1038.6,787.4 1044,782 1044,778 1026.04,760.04 1026.04,726 ; v1(1026.04,704.36) 1026.04,726 ; RP3.4@2597.24,906.76 RP3.4@2606.53,906.76 2620.03,906.76 v2(2637,889.79) 2663.79,863 2678,863 2696,845 2696,719 2723,692 v1(2721,692) ; U2.4@2933.86,639.86 2965,670.99 2965,682 v1(2956,691)
ETH_SCK: TETH_SCK.1 U1.33 U2.15 | length 6549.5
  TopLayer w6: v1(1102,684) 1102,691.83 1147.33,737.16 1209.6,737.16 1216.44,744 1344.06,744 1353.9,734.16 1545.16,734.16 v2(1675,864) 1816,1005 1989.12,1005 2050.96,943.16 2328.6,943.16 2339.89,954.45 2457.22,954.45 2473.7,937.96 2663.6,937.96 2686.48,915.08 v2(2688.08,915.08) ; v2(1735.5,1765.5) 1737.64,1765.5 1757.14,1785 5235,1785 TETH_SCK.1@5300,1850
  BottomLayer w6: v1(1102,684) 1102,691.83 1112.2,702.03 U1.33@1112.2,736.22 ; v2(1675,864) 1687,876 1687,1175 1718,1206 1718,1748 v2(1735.5,1765.5) ; v2(2688.08,915.08) 2721.15,882 2819.78,882 U2.15@2850.35,851.43
ETH_SCS: RP3.2 TETH_CS.1 U1.32 U2.14 | length 6738.5
  TopLayer w6: v1(1127.91,691.09) 1161.98,725.16 1214.57,725.16 1221.41,732 1339.09,732 1348.93,722.16 1563.16,722.16 v2(1716,875) 1834,993 1984.15,993 2045.99,931.16 2333.57,931.16 2344.86,942.45 2452.25,942.45 2468.73,925.96 2651.74,925.96 v2(2662,915.7) ; v1(1718,1179) 1718,1369 v1(1739,1390) ; v2(1764,1768) 1769,1773 5423,1773 TETH_CS.1@5500,1850
  BottomLayer w6: v1(1127.91,691.09) 1131.89,695.07 U1.32@1131.89,736.22 ; v2(1716,875) 1699,892 1699,1160 v1(1718,1179) ; v1(1739,1390) 1739,1743 v2(1764,1768) ; RP3.2@2606.53,969.75 2610.4,969.75 2662,918.15 v2(2662,915.7) 2707.7,870 2803.94,870 U2.14@2836.43,837.51
FANVCCA: FANA.2 Q1A.D | length 755.6
  TopLayer w25: v3(3323,731) v3(3371,731) 3713.98,731 FANA.2@3770.35,787.36
  BottomLayer w20: FANA.2@3770.35,787.36 FANA.2@3775,782.71
  BottomLayer w25: Q1A.D@3321,800.36 3321,733 v3(3323,731) ; v3(3371,731) Q1A.D@3371,800.36 ; v3(3421,731) Q1A.D@3421,800.36 ; v3(3471,731) Q1A.D@3471,800.36
FANVCCB: FANB.2 Q1B.D | length 785.7
  BottomLayer w20: FANB.2@4210.04,787.41 FANB.2@4214.69,782.76
  BottomLayer w25: FANB.2@4210.04,787.41 4279.63,857 4341,857 4376,822 4376,760 4327,711 ; Q1B.D@4252.64,585 4320,585 4327,592 4327,639 ; Q1B.D@4252.64,635 4323,635 4327,639 ; Q1B.D@4252.64,685 4327,685 ; Q1B.D@4252.64,735 4316,735 4327,724 4327,685 ; 4327,639 4327,685
FANVCCC: FANC.2 Q1C.D | length 500.7
  BottomLayer w20: FANC.2@4648.03,787.4 FANC.2@4652.69,782.75
  BottomLayer w25: Q1C.D@4635.64,860 4576.37,860 4574.37,862 ; Q1C.D@4635.64,910 4574.37,910 ; Q1C.D@4635.64,960 4586,960 4574.37,948.37 ; Q1C.D@4635.64,1010 4591,1010 4574.37,993.37 4574.37,948.37 ; FANC.2@4648.03,787.4 4574.37,861.06 4574.37,862 ; 4574.37,862 4574.37,910 ; 4574.37,910 4574.37,948.37